# EAGLE board Environment-ArduinoNano44-Mini-Enclosure-V10 (EAGLE 7.4.0)
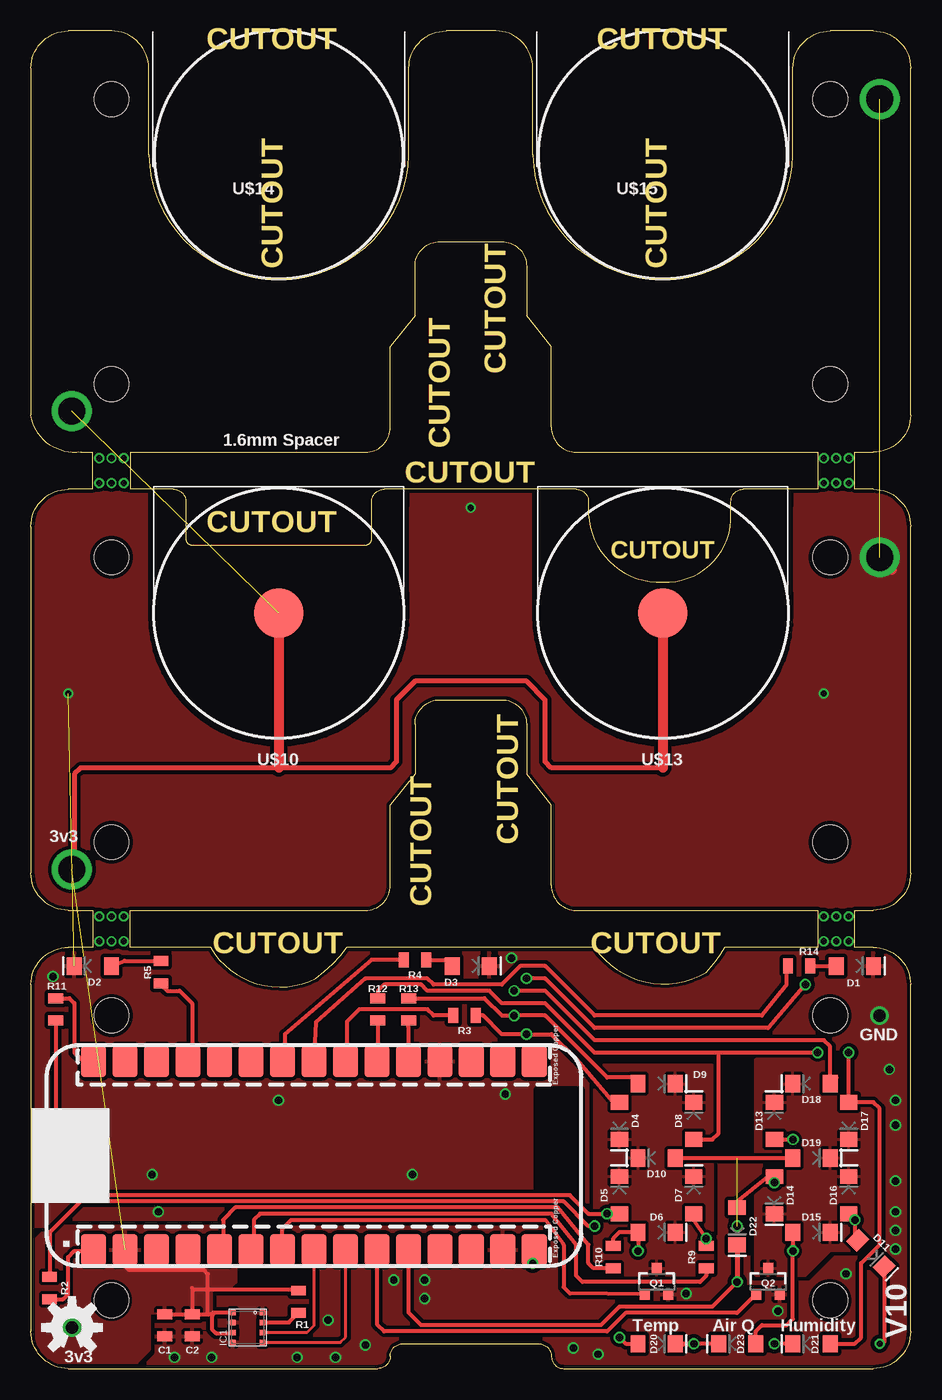
[diagram p0: board, top side]
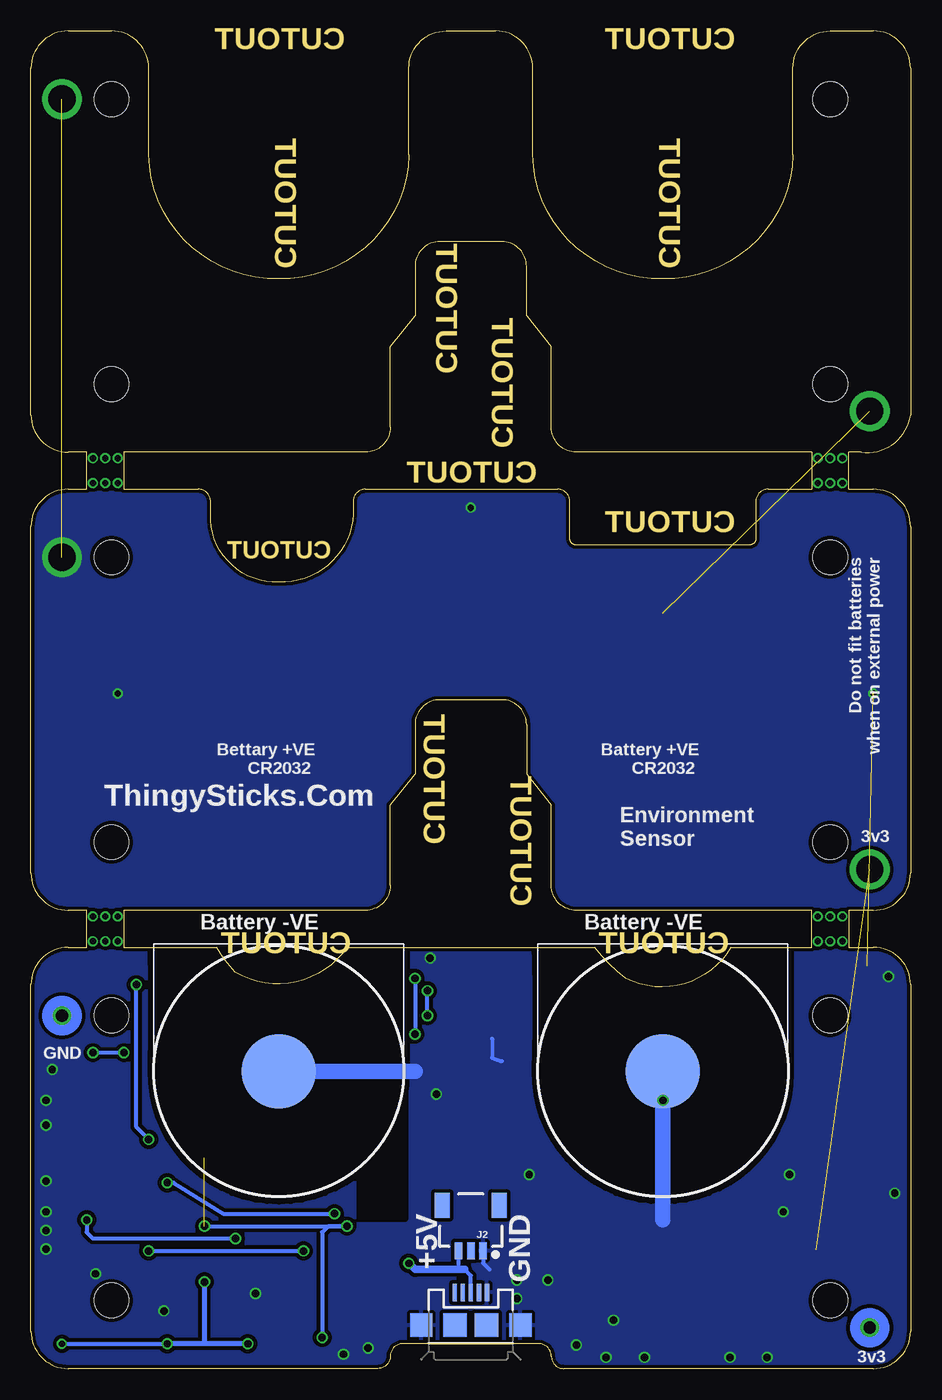
[diagram p1: board, bottom side, seen from below]

Size 71 x 108 mm. Coordinates in mm from the lower left corner, seen from the top.
Outline: 3,0 28,0 arc90 29,1 arc-90 30,2 41,2 arc-90 42,1 arc90 43,0 68,0 arc90 71,3 71,31 arc90 68,34 66.5,34 66.5,37 68,37 arc90 71,40 71,68 arc90 68,71 66.5,71 66.5,74 68,74 arc90 71,77 71,105 arc90 68,108 64.5,108 arc90 61.5,105 61.5,98 arc-90 51,88 arc-90 40.5,98 40.5,105 arc90 37.5,108 33.5,108 arc90 30.5,105 30.5,98 arc-90 20,88 arc-90 9.5,98 9.5,105 arc90 6.5,108 3,108 arc90 0,105 0,77 arc90 4,74 5,74 5,71 3,71 arc90 0,68 0,40 arc90 3,37 5,37 5,34 3,34 arc90 0,31 0,3 arc90 3,0
Outline: 63.5,34 56,34 arc-16 54.5,32 arc-86 45.5,34 25.5,34 arc-16 23,31.5 arc-86 14.5,34 8,34 8,37 27,37 arc90 29,39 29,45.5 31,48 31,52 arc-90 33,54 38,54 arc-90 40,52 40,48 42,45.5 42,39 arc90 44,37 63.5,37 63.5,34
Outline: 44,71 28.5,71 arc90 27.5,70 27.5,67 arc-90 27,66.5 13,66.5 arc-90 12.5,67 12.5,70 arc90 11.5,71 8,71 8,74 27,74 arc90 29,76 29,82.5 31,85 31,89 arc-90 33,91 38,91 arc-90 40,89 40,85 42,82.5 42,76 arc90 44,74 63.5,74 63.5,71 57.5,71 arc90 56.5,70 56.5,69 arc-95 51,63.5 arc-90 45,69 45,70 arc90 44,71
Copper layers (1*16): Top 0.035mm / dielectric 1.5mm / Bottom 0.035mm
Design rules "dirt_cheap_dirty_boards.v1.1": minimum track width 6mil, minimum drill 12mil, track to track 6mil, track to pad 6mil, pad to pad 6mil, via to via 6mil, smd to smd 0mil, copper to edge 10mil, drill to drill 10mil, minimum pad ring 10mil, minimum via ring 6mil, stop-mask expansion 2mil, vias tented up to drill 25mil, thermal gap 10mil
Holes 2.8 mm at 64.5,28.5 6.5,28.5 6.5,5.5 64.5,5.5 64.5,65.5 6.5,65.5 6.5,42.5 64.5,42.5 64.5,102.5 6.5,102.5 6.5,79.5 64.5,79.5
tKeepout: area 4.5,26.5 to 8.5,30.5; area 4.3,3.3 to 8.7,7.7; area 62.3,3.3 to 66.7,7.7; area 62.3,26.3 to 66.7,30.7; area 0,74 to 71,108
bKeepout: area 62.5,26.5 to 66.5,30.5; area 62.5,3.5 to 66.5,7.5; area 4.3,26.3 to 8.7,30.7; area 4.5,3.5 to 8.5,7.5; area 41,51 to 61,71; area 10,51 to 30,71; area 0,0 to 71,34; area 0,74 to 71,108
tRestrict: area 10,90 to 30,110; area 41,88 to 61,108; area 10,51 to 30,71; area 41,51 to 61,71; area 0,74 to 71,108
bRestrict: area 10,14 to 30,34; area 41,14 to 61,34; area 0,74 to 71,108

## Footprints (pad centres in the part's own frame; a part is rotated, then mirrored left to right if it is on the bottom)
0805 = smd 0.8 x 1.2: 1 -0.9,0; 2 0.9,0
LED-1206 = smd 1.2 x 1.4: A -1.5,0; C 1.5,0
BME680 = smd 0.45 x 0.45: 1 1.2,-1.2; 2 0.4,-1.2; 3 -0.4,-1.2; 4 -1.2,-1.2; 5 -1.2,1.2; 6 -0.4,1.2; 7 0.4,1.2; 8 1.2,1.2
1X03-1MM-RA = smd 0.6 x 1.35: 1 -1,0; 2 0,0; 3 1,0 | smd 1.2 x 2: NC1 2.3,-3.675; NC2 -2.3,-3.675
USB-MICROB = smd 0.35 x 1.4: D+ 0,2.65; D- -0.65,2.65; GND 1.3,2.65; ID 0.65,2.65; VBUS -1.3,2.65 | smd 1.8 x 1.9: MT1 -4,0; MT2 4,0 | smd 1.9 x 1.9: P$1 -1.27,0; P$2 1.27,0
SOT23-3 = smd 0.8 x 0.9: 1 -0.95,-1; 2 0.95,-1; 3 0,1.1
ARDUINO_NANO_33_SMD = smd 2.54 x 2.032: 1 1.27,-3.81; @2 1.27,-6.35; @3 1.27,-8.89; @4 1.27,-11.43; @5 1.27,-13.97; @6 1.27,-16.51; @7 1.27,-19.05; @8 1.27,-21.59; @9 1.27,-24.13; @10 1.27,-26.67; @11 1.27,-29.21; @12 1.27,-31.75; @13 1.27,-34.29; @14 1.27,-36.83; @15 1.27,-39.37; @16 16.51,-39.37; @17 16.51,-36.83; @18 16.51,-34.29; @19 16.51,-31.75; @20 16.51,-29.21; @21 16.51,-26.67; @22 16.51,-24.13; @23 16.51,-21.59; @24 16.51,-19.05; @25 16.51,-16.51; @26 16.51,-13.97; @27 16.51,-11.43; @28 16.51,-8.89; @29 16.51,-6.35; @30 16.51,-3.81
CR2032-SMD-NEGATIVE-TERMINAL = smd 6 x 6: - 0,0
CR2032-SMD-POSITIVE-TERMINAL = smd 4 x 4 bottom: + 0,0

## Placement (x,y rotation side)
C1  0.1uF  [0805]  10.79,3.49 270 top
C2  1.0uF  [0805]  13.02,3.49 270 top
D1  Red  [LED-1206]  66.5,32.5 0 top
D2  Yellow  [LED-1206]  5,32.5 180 top
D3  Green  [LED-1206]  35.5,32.5 0 top
D4  Blue  [LED-1206]  47.5,20 270 top
D5  Blue  [LED-1206]  47.5,14 90 top
D6  Blue  [LED-1206]  50.5,11 0 top
D7  Blue  [LED-1206]  53.5,14 90 top
D8  Blue  [LED-1206]  53.5,20 90 top
D9  Blue  [LED-1206]  50.5,23 0 top
D10  Blue  [LED-1206]  50.5,17 180 top
D11  Blue  [LED-1206]  67.8,9.3 315 top
D13  Blue  [LED-1206]  60,20 90 top
D14  Blue  [LED-1206]  60,14 270 top
D15  Blue  [LED-1206]  63,11 0 top
D16  Blue  [LED-1206]  66,14 90 top
D17  Blue  [LED-1206]  66,20 270 top
D18  Blue  [LED-1206]  63,23 180 top
D19  Blue  [LED-1206]  63,17 0 top
D20  Green  [LED-1206]  50.5,2 0 top
D21  Green  [LED-1206]  63,2 180 top
D22  Blue  [LED-1206]  57,11.5 270 top
D23  Green  [LED-1206]  57,2 180 top
IC1  BME680  [BME680]  17.5,3.32 90 top
J2  [1X03-1MM-RA]  35.5,9.5 180 bottom
JP2  USB-NEW-MICROB  [USB-MICROB]  35.5,3.5 0 bottom
LOGO1  OSHW-LOGOM  [OSHW-LOGO-M]  3.33,3.32 0 top
Q1  5.8A/30V/35mΩ  [SOT23-3]  50.5,7 0 top
Q2  5.8A/30V/35mΩ  [SOT23-3]  59.5,7 0 top
R1  10k  [0805]  21.59,5.4 90 top
R2  1k5  [0805]  1.5,6.5 270 top
R3  1k5  [0805]  35,28.5 180 top
R4  1k5  [0805]  31,33 180 top
R5  1k5  [0805]  10.5,32 270 top
R9  1k5  [0805]  54.5,9 90 top
R10  1k5  [0805]  47,9 90 top
R11  1k5  [0805]  2,29 90 top
R12  1k5  [0805]  28,29 270 top
R13  1k5  [0805]  30.5,29 270 top
R14  1k5  [0805]  62,32.5 180 top
U$1  ARDUINO_33_NANOARDUINO_NANO_33_BLE_SENSE_SMD  [ARDUINO_NANO_33_SMD]  1.25,8.3 90 top
U$8  CR2032-SPLIT-PCBCR2032-NEGATIVE  [CR2032-SMD-NEGATIVE-TERMINAL]  20,24 0 bottom
U$9  CR2032-SPLIT-PCBCR2032-NEGATIVE  [CR2032-SMD-NEGATIVE-TERMINAL]  51,24 0 bottom
U$10  CR2032-SPLIT-PCB-POSITIVE  [CR2032-SMD-POSITIVE-TERMINAL]  20,61 0 bottom
U$13  CR2032-SPLIT-PCB-POSITIVE  [CR2032-SMD-POSITIVE-TERMINAL]  51,61 0 bottom
U$14  CR2032-SPLIT-PCB-MIDDLE  [CR2032-SMD-MIDDLE-OUTLINE]  20,98 0 top
U$15  CR2032-SPLIT-PCB-MIDDLE  [CR2032-SMD-MIDDLE-OUTLINE]  51,98 0 top

## Library data of the parts
C1 C2 D1-D11 D13-D23 IC1 U$1 U$8-U$10 U$13-U$15 = ThingySticks
J2 = SparkFun-Connectors
JP2 = Tinamous; PROD_ID: CONN-09505
LOGO1 = SparkFun-Aesthetics
Q1 Q2 = SparkFun-DiscreteSemi; PROD_ID: TRANS-12988
R1-R5 R9-R14 = SparkFun-Resistors

## Nets
3.3V: C1.1 C2.1 IC1.6 IC1.8 R1.2 U$1.@2 U$10.+ U$13.+
A: D9.A D18.A R13.1
B: D8.A D17.A D21.A R12.1
C: D7.A D11.A D16.A R9.2
D: D6.A D15.A D23.A R10.2
DIGIT1: D4.C D5.C D6.C D7.C D8.C D9.C D10.C Q1.3
DIGIT1_SELECT: Q1.1 U$1.@7
DIGIT2: D13.C D14.C D15.C D16.C D17.C D18.C D19.C Q2.3
DIGIT2_SELECT: Q2.1 U$1.@10
DIGIT3: D11.C D20.C D21.C D22.C D23.C U$1.@11
E: D5.A D14.A D22.A R11.1
F: D4.A D13.A R3.1
G: D10.A D19.A D20.A R2.1
GND: C1.2 C2.2 D1.C D2.C D3.C IC1.1 IC1.5 IC1.7 J2.1 JP2.GND JP2.MT1 JP2.MT2 Q1.2 Q2.2 U$1.@14 U$1.@19 U$8.- U$9.-
GREEN: R4.2 U$1.@24
N$2: IC1.2 R1.1
N$4: D1.A R14.1
N$7: R9.1 U$1.@6
N$8: R2.2 U$1.1
N$9: R11.2 U$1.@30
N$10: R12.2 U$1.@21
N$11: R10.1 U$1.@5
N$12: R13.2 U$1.@20
N$13: R3.2 U$1.@22
N$14: D3.A R4.1
N$16: D2.A R5.1
NCF_ANTENNA1: U$1.@26
NCF_ANTENNA2: U$1.@25
RED: R14.2 U$1.@23
RX: U$1.@17
SCL: IC1.4 U$1.@9
SDA: IC1.3 U$1.@8
TX: U$1.@16
VIN: J2.3 JP2.D+ U$1.@15
VUSB: U$1.@12
YELLOW: R5.2 U$1.@27

## Tracks (layer width: path | path; a pad name or v marks a point on that pad's centre or on a via)
3.3V  (via drill 1, 2.2)  (2 unrouted)
  Top 0.305: 14.85,4.52 14.68,4.52 14.61,4.13 14.61,3.17 14.92,2.86 16.24,2.86 IC1.6 | 14.34,4.39 14.29,4.45 14.29,7.62 13.97,7.94 7.94,7.94 7.62,8.26 7.62,9.55 U$1.@2 | C1.1 C2.1 | C2.1 14.34,4.39 | 14.34,4.39 14.85,4.52 | R1.2 21.54,6.35 13.15,6.35 13,6.5 13,4.41 C2.1 | IC1.8 14.85,4.52
  Top 0.406: 51,48.5 42,48.5 41.5,49 41.5,54 40,55.5 31,55.5 29.5,54 29.5,49 29,48.5 20,48.5 4,48.5 3.5,48 3.5,40.5 v3.3,40.3
  Top 0.813: U$13.+ 51,48.5 | U$10.+ 20,48.5
  other vias: 3.3,3.3 3.3,77.3
  pour Top (isolate 0.254, rank 2): 1.5,11.5 16,11.5 16.5,11 16.5,7 16,6.5 14.5,6.5 14.5,4.5 9.5,4.5 9.5,1.5 8.5,0.5 1.5,0.5 0.5,1.5 0.5,10.5
A  (via drill 0.6)
  Top 0.305: D18.A 65,23.5 64.5,23.5 64.5,26 64,26.5 45.5,26.5 41.5,30.5 v39,30.5 | D9.A 48.5,23.5 46.5,23.5 41.5,28.5 v39,28.5 38,28.5 36.6,29.9 R13.1
  Bottom 0.305: v39,28.5 v39,30.5
B  (via drill 0.6)
  Top 0.305: v63.5,25.5 55.5,25.5 | 55.5,25.5 45.5,25.5 41.5,29.5 38,29.5 37,30.5 32,30.5 31.5,31 28.5,31 28,30.5 R12.1 | v66,25.5 D17.A 68,21.5 68.5,21 68.5,10 67,8.5 67,2.5 66.5,2 D21.A | D8.A 55,18.5 55.5,19 55.5,25.5
  Bottom 0.305: v63.5,25.5 v66,25.5
C  (via drill 0.6)
  Top 0.305: D16.A v66.5,12 66.5,10.6 D11.A | D7.A 53.5,12 v54.5,10.5 R9.2
  Bottom 0.305: v66.5,12 66.5,11 66,10.5 v54.5,10.5
D  (via drill 0.6)
  Top 0.305: D15.A v61.5,9.5 61.5,4 61,3.5 59,3.5 58.5,3 D23.A | v49,9.5 D6.A 47.5,11 47,10.5 R10.2
  Bottom 0.305: v61.5,9.5 v49,9.5
DIGIT1
  pour Top (isolate 0.254, rank 2): 45.5,24.5 55,24.5 55,7.5 45.5,7.5
DIGIT1_SELECT
  Top 0.305: Q1.1 43.5,6.08 43,6.58 43,10 41.5,12 21,12 20.3,11.3 U$1.@7
DIGIT2
  pour Top (isolate 0.254, rank 2): 58.5,25 68,25 68,10.5 67,9.5 64.5,9.5 62.5,7.5 58.5,7.5
DIGIT2_SELECT
  Top 0.305: Q2.1 58.35,5.85 57,4.5 48,4.5 46.5,3 28.5,3 27.92,3.58 U$1.@10
DIGIT3  (via drill 0.5, 0.6)
  Top 0.305: v57,7 55,5 47.5,5 46,3.5 31.5,3.5 30.46,4.54 U$1.@11 | 61,2 v60,2 | D23.C v53.5,2 | D11.C 68.86,2.14 v68.5,2
  Top 0.406: D22.C v57,7 | D21.C 61,2 | D20.C v53.5,2
  Bottom 0.305: v68.5,2 v60,2
  Bottom 0.406: v57,7 57,2 | 57,2 v60,2 | v53.5,2 57,2
E  (via drill 0.6)
  Top 0.305: v60,15 D14.A 59.5,15.5 57,13.5 D22.A | R11.1 2,16 4,14 43.5,14 45,12.5 v46.5,12.5 D5.A
  Bottom 0.305: v60,15 59.5,15 55.5,12.5 v46.5,12.5
F  (via drill 0.6)
  Top 0.305: v62.5,31 59.5,27.5 45.5,27.5 41.5,31.5 v40,31.5 | D4.A 47,21.5 44,25 42,27 v40,27 38,27 36.5,28.5 R3.1 | D13.A v61.5,18.5
  Bottom 0.305: v40,31.5 v40,27 | v62.5,31 62.5,19.5 v61.5,18.5
G  (via drill 0.6)  (1 unrouted)
  Top 0.305: D19.A 57,17 D10.A | v45.5,11.5 45,11.5 43,13.5 4,13.5 1.5,11 R2.1 | v47.5,2.5 48,2 D20.A
  Bottom 0.305: v57,11.5 v45.5,11.5 47,11.5 47.5,11 v47.5,2.5
GND  (via drill 0.5, 0.6, 1, 2.2)  (2 unrouted)
  Top 0.813: 69.5,64.5 v68.5,65.5 | 1,13.87 v1.28,14.15
  Bottom 0.305: J2.1 34.5,8.5 34,8 | 33.78,26.65 33.78,25.09 U$1.@19
  Bottom 1.27: U$8.- 20,12 | U$9.- 40,24
  other vias: 24.58,0.91 21.48,0.91 60.28,4.65 52.88,6.05 65.78,7.65 69.28,24.15 38.78,33.15 30.78,15.65 1.78,31.65 9.78,15.65 31.78,7.15 14.58,0.91 26.98,1.91 11.58,0.91 68.5,28.5 68.5,102.5 69.78,21.65 69.78,19.65 69.78,15.15 69.78,12.65 69.78,11.15 69.78,9.65 38.28,22.15 45.78,1.15 43.78,1.65 31.78,5.65 23.98,3.9 3,54.5 35.5,69.5 64,54.5 10.28,12.65 29.28,7.15 19.98,21.65
  pour Bottom (isolate 0.305, rank 6): 0,33.97 71.12,33.97 71.12,0 0,0
  pour Top (isolate 0.305, rank 6): 0,33.97 71.12,33.97 71.12,0 0,0
  pour Bottom (isolate 0.305, rank 4): 0,71 71,71 71,37 0,37
  pour Top (isolate 0.305, rank 4): 0,71 71,71 71,37 0,37
GREEN
  Top 0.305: U$1.@24 20.5,25.2 20.5,27 27.5,33 R4.2
N$1  (via drill 0.5)
  other vias: 5.5,34.5
N$2
  Top 0.305: IC1.2 20.81,3.72 R1.1
N$3  (via drill 0.5)
  other vias: 6.5,34.5
N$4
  Top 0.305: R14.1 D1.A
N$7
  Top 0.305: R9.1 54.5,7.5 54,7 44.5,7 44,7.5 44,10 42,12.5 18.5,12.5 18,12 18,9.81 U$1.@6
N$8
  Top 0.305: R2.2 2.6,5.6 3,6 3,9 3.5,9.5 4.99,9.5 U$1.1
N$9
  Top 0.305: R11.2 3.1,29.9 3.5,29.5 3.5,25.5 4,25 4.88,25 U$1.@30
N$10
  Top 0.305: R12.2 28,24.89 U$1.@21
N$11
  Top 0.305: R10.1 45.4,8.1 45,8.5 45,10 42.5,13 16.5,13 15.5,12 15.5,9.86 U$1.@5
N$12
  Top 0.305: R13.2 30.46,27.56 U$1.@20
N$13
  Top 0.305: U$1.@22 25.5,25 25.5,28 26.5,29 32,29 32.5,28.5 R3.2
N$14
  Top 0.305: R4.1 33.95,33 D3.A
N$15  (via drill 0.5)
  other vias: 7.5,34.5
N$16
  Top 0.305: D2.A 7.53,32.93 R5.1
N$17  (via drill 0.5)
  other vias: 7.5,36.5
N$18  (via drill 0.5)
  other vias: 6.5,36.5
N$19  (via drill 0.5)
  other vias: 5.5,36.5
N$20  (via drill 0.5)
  other vias: 64,34.5
N$21  (via drill 0.5)
  other vias: 65,34.5
N$22  (via drill 0.5)
  other vias: 66,34.5
N$23  (via drill 0.5)
  other vias: 66,36.5
N$24  (via drill 0.5)
  other vias: 65,36.5
N$25  (via drill 0.5)
  other vias: 64,36.5
N$26  (via drill 0.5)
  other vias: 64,71.5
N$27  (via drill 0.5)
  other vias: 65,71.5
N$28  (via drill 0.5)
  other vias: 66,71.5
N$29  (via drill 0.5)
  other vias: 66,73.5
N$30  (via drill 0.5)
  other vias: 65,73.5
N$31  (via drill 0.5)
  other vias: 64,73.5
N$32  (via drill 0.5)
  other vias: 5.5,73.5
N$33  (via drill 0.5)
  other vias: 6.5,73.5
N$34  (via drill 0.5)
  other vias: 7.5,73.5
N$35  (via drill 0.5)
  other vias: 7.5,71.5
N$36  (via drill 0.5)
  other vias: 6.5,71.5
N$37  (via drill 0.5)
  other vias: 5.5,71.5
RED
  Top 0.305: U$1.@23 23,27.95 27,31.5 32,31.5 32.5,31 38,31 39.5,32.5 41.5,32.5 45.5,28.5 59,28.5 61,31 61,32.4 R14.2
SCL
  Top 0.254: IC1.4 24.98,2.12 25.4,2.54 25.4,9.55 U$1.@9
  Top 0.305: 25.4,9.6 U$1.@9
SDA
  Top 0.254: IC1.3 22.29,2.92 22.86,3.49 22.86,9.55 U$1.@8
  Top 0.305: 22.86,9.6 U$1.@8
VIN  (via drill 0.6)
  Top 0.61: v40.5,8.5 40.5,9.46 U$1.@15
  Bottom 0.305: JP2.D+ 35.5,7.5 36,8 | J2.3 36.5,8
  Bottom 0.61: 36,8 36.5,8 40,8 v40.5,8.5
YELLOW
  Top 0.305: R5.2 10.4,31.1 11,30.5 12,30.5 13,29.5 13,25.09 U$1.@27
(copper drawn outside any net)
  shapes: Bottom circle x2

## Text on the board
Dimension: CUTOUT | CUTOUT | CUTOUT | CUTOUT | CUTOUT | CUTOUT | CUTOUT | CUTOUT | CUTOUT | CUTOUT | CUTOUT | CUTOUT | CUTOUT
tNames: 1.6mm Spacer | 3v3 | GND | Temp | Air Q | Humidity | 3v3 | V10
bNames: Do not fit batteries / when on external power | Battery +VE | Bettary +VE | CR2032 | CR2032 | ThingySticks.Com | 3v3 | Environment / Sensor | GND | GND | +5V | 3v3
Document: Cable exit / From under PCB to / Front, then up to top | Cable exit / From under PCB to / Front, then up to top | For Enclosure: / Hammon - 1551V2WH - / Plastic Enclosure, Small, ABS, 80 mm, 40 mm, 20 mm, IP30 / / Farnell: 2985869 | Top PCB has pads on solder side / for batteyr -VE connection
Reference: Middle PCB | 1mm PCB | Bottom PCB | 1mm PCB | Top PCB